# Altium PCB ZIF_to_2xZIF.PcbDoc (part 3 of 3)
Units mil, origin at the board's own origin, x right, y up, seen from the top; angles counter-clockwise.
Board outline 1622.05 x 16535.43 mil, 2 copper layers (Top Layer, Bottom Layer), stack 3.189 mil thick; 3 components, 51 nets, 153 pads, 51 vias.
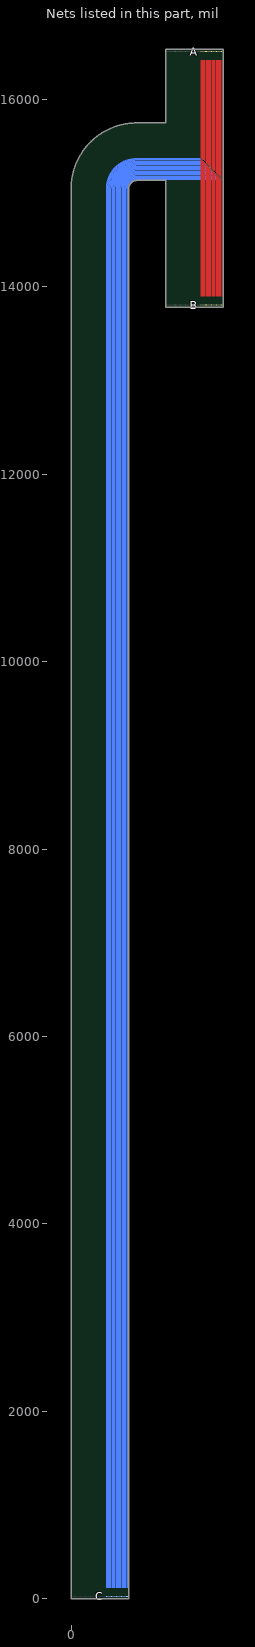
[diagram p3: the nets of this part, all layers, seen from the top]

## Via types
v1: diameter 11.81, hole 3.94, Top Layer to Bottom Layer, 51 vias

## Nets (pads, with @x,y where several pads share a name; then routed paths per layer and width w, separated by ;. In a path a pad name is that pad's centre, name@x,y a point inside that pad or via, vN(x,y) a via of type N, cw(c..) or ccw(c..) an arc to the next point about the centre after c; other vN are vias at no path point) (continued)
FPC_32: A.32 B.32 C.32 | length 18635.1
  Top Layer w3.94: 1385.83,15110.24 1385.83,15759.84
  Top Layer w7.87: 1385.83,13899.61 1385.83,15110.24 ; 1385.83,15759.84 1385.83,16415.35
  Bottom Layer w3.94: 377.95,14881.89 377.95,15047.24 378,15052.88 378.15,15058.51 378.4,15064.14 378.74,15069.76 379.18,15075.38 379.72,15080.99 380.36,15086.59 381.09,15092.17 381.93,15097.75 382.86,15103.3 383.88,15108.84 385.01,15114.37 386.23,15119.87 387.54,15125.34 388.95,15130.8 390.46,15136.23 392.06,15141.63 393.75,15147.01 395.54,15152.35 397.42,15157.66 399.4,15162.94 401.46,15168.18 403.62,15173.39 405.86,15178.55 408.2,15183.68 410.63,15188.77 413.14,15193.81 415.74,15198.81 418.43,15203.76 421.2,15208.66 424.06,15213.52 427.01,15218.32 430.04,15223.07 433.15,15227.77 436.34,15232.41 439.61,15237 442.96,15241.53 446.39,15246 449.9,15250.41 453.48,15254.76 457.14,15259.04 460.87,15263.26 464.68,15267.42 468.56,15271.5 472.51,15275.52 476.53,15279.47 480.61,15283.35 484.77,15287.16 488.99,15290.89 493.27,15294.55 497.62,15298.13 502.03,15301.64 506.5,15305.07 511.03,15308.42 515.62,15311.69 520.26,15314.89 524.96,15318 529.71,15321.02 534.52,15323.97 539.37,15326.83 544.27,15329.6 549.23,15332.29 554.22,15334.89 559.27,15337.41 564.35,15339.83 569.48,15342.17 574.65,15344.42 579.85,15346.57 585.09,15348.64 590.37,15350.61 595.68,15352.49 601.03,15354.28 606.4,15355.97 611.8,15357.57 617.23,15359.08 622.69,15360.49 628.17,15361.8 633.67,15363.02 639.19,15364.15 644.73,15365.17 650.28,15366.1 655.86,15366.94 661.44,15367.67 667.04,15368.31 672.65,15368.85 678.27,15369.29 683.89,15369.64 689.52,15369.88 695.15,15370.03 700.79,15370.08 v1(1385.83,15370.08)
  Bottom Layer w7.87: 377.95,120.08 377.95,14881.89
FPC_33: A.33 B.33 C.33 | length 18628.3
  Top Layer w3.94: 1397.64,15110.24 1397.64,15759.84
  Top Layer w7.87: 1397.64,13899.61 1397.64,15110.24 ; 1397.64,15759.84 1397.64,16415.35
  Bottom Layer w3.94: 389.76,14881.89 389.76,15047.24 389.81,15052.67 389.95,15058.1 390.19,15063.52 390.52,15068.94 390.95,15074.35 391.47,15079.75 392.08,15085.15 392.79,15090.53 393.59,15095.9 394.49,15101.25 395.48,15106.59 396.56,15111.91 397.74,15117.21 399,15122.49 400.36,15127.74 401.81,15132.97 403.35,15138.18 404.99,15143.36 406.71,15148.5 408.52,15153.62 410.42,15158.7 412.41,15163.76 414.49,15168.77 416.65,15173.75 418.9,15178.69 421.24,15183.59 423.66,15188.45 426.17,15193.26 428.76,15198.03 431.43,15202.76 434.19,15207.43 437.02,15212.06 439.94,15216.64 442.94,15221.17 446.01,15225.64 449.16,15230.06 452.39,15234.42 455.7,15238.73 459.08,15242.98 462.53,15247.17 466.05,15251.29 469.65,15255.36 473.32,15259.36 477.06,15263.3 480.86,15267.17 484.73,15270.98 488.67,15274.71 492.67,15278.38 496.74,15281.98 500.87,15285.5 505.05,15288.95 509.3,15292.33 513.61,15295.64 517.97,15298.87 522.39,15302.02 526.87,15305.09 531.39,15308.09 535.97,15311.01 540.6,15313.84 545.28,15316.6 550,15319.27 554.77,15321.86 559.59,15324.37 564.44,15326.79 569.34,15329.13 574.28,15331.38 579.26,15333.54 584.28,15335.62 589.33,15337.61 594.41,15339.51 599.53,15341.32 604.68,15343.05 609.85,15344.68 615.06,15346.22 620.29,15347.67 625.54,15349.03 630.82,15350.3 636.12,15351.47 641.44,15352.55 646.78,15353.54 652.13,15354.44 657.5,15355.24 662.88,15355.95 668.28,15356.56 673.68,15357.08 679.09,15357.51 684.51,15357.84 689.93,15358.08 695.36,15358.22 700.79,15358.27 v1(1397.64,15358.27)
  Bottom Layer w7.87: 389.76,120.08 389.76,14881.89
FPC_34: A.34 B.34 C.34 | length 18621.6
  Top Layer w3.94: 1409.45,15110.24 1409.45,15759.84
  Top Layer w7.87: 1409.45,13899.61 1409.45,15110.24 ; 1409.45,15759.84 1409.45,16415.35
  Bottom Layer w3.94: 401.57,14881.89 401.57,15047.24 401.62,15052.47 401.76,15057.69 401.98,15062.9 402.3,15068.12 402.71,15073.32 403.21,15078.52 403.81,15083.71 404.49,15088.89 405.26,15094.05 406.12,15099.2 407.07,15104.34 408.11,15109.45 409.24,15114.55 410.46,15119.63 411.77,15124.69 413.17,15129.72 414.65,15134.73 416.22,15139.71 417.88,15144.66 419.62,15149.58 421.45,15154.47 423.36,15159.33 425.36,15164.16 427.44,15168.94 429.61,15173.7 431.86,15178.41 434.19,15183.08 436.6,15187.72 439.09,15192.31 441.66,15196.85 444.31,15201.35 447.04,15205.8 449.85,15210.21 452.73,15214.56 455.69,15218.87 458.72,15223.12 461.83,15227.31 465,15231.46 468.26,15235.54 471.58,15239.57 474.97,15243.55 478.43,15247.46 481.96,15251.31 485.55,15255.09 489.21,15258.82 492.94,15262.48 496.72,15266.07 500.58,15269.6 504.49,15273.06 508.46,15276.45 512.49,15279.78 516.57,15283.03 520.72,15286.21 524.91,15289.31 529.17,15292.34 533.47,15295.3 537.82,15298.18 542.23,15300.99 546.68,15303.72 551.18,15306.37 555.73,15308.94 560.32,15311.43 564.95,15313.84 569.62,15316.17 574.33,15318.42 579.09,15320.59 583.88,15322.67 588.7,15324.67 593.56,15326.58 598.45,15328.41 603.37,15330.16 608.33,15331.81 613.31,15333.38 618.31,15334.87 623.35,15336.26 628.4,15337.57 633.48,15338.79 638.58,15339.92 643.69,15340.96 648.83,15341.91 653.98,15342.77 659.15,15343.54 664.32,15344.23 669.51,15344.82 674.71,15345.32 679.92,15345.73 685.13,15346.05 690.35,15346.27 695.57,15346.41 700.79,15346.46 v1(1409.45,15346.46)
  Bottom Layer w7.87: 401.57,120.08 401.57,14881.89
FPC_35: A.35 B.35 C.35 | length 18614.8
  Top Layer w3.94: 1421.26,15110.24 1421.26,15759.84
  Top Layer w7.87: 1421.26,13899.61 1421.26,15110.24 ; 1421.26,15759.84 1421.26,16415.35
  Bottom Layer w3.94: 413.39,14881.89 413.39,15047.24 413.43,15052.26 413.56,15057.27 413.78,15062.29 414.09,15067.29 414.48,15072.29 414.96,15077.29 415.53,15082.27 416.18,15087.24 416.92,15092.2 417.75,15097.15 418.67,15102.08 419.67,15107 420.75,15111.9 421.92,15116.77 423.18,15121.63 424.52,15126.46 425.94,15131.27 427.45,15136.06 429.04,15140.81 430.72,15145.54 432.47,15150.24 434.31,15154.91 436.23,15159.54 438.23,15164.14 440.31,15168.71 442.47,15173.23 444.71,15177.72 447.03,15182.17 449.42,15186.58 451.89,15190.94 454.44,15195.27 457.06,15199.54 459.75,15203.77 462.52,15207.96 465.36,15212.09 468.27,15216.17 471.26,15220.21 474.31,15224.19 477.43,15228.11 480.62,15231.98 483.88,15235.8 487.21,15239.55 490.6,15243.25 494.05,15246.89 497.56,15250.47 501.14,15253.98 504.78,15257.44 508.48,15260.83 512.24,15264.15 516.05,15267.41 519.92,15270.6 523.85,15273.72 527.82,15276.77 531.86,15279.76 535.94,15282.67 540.07,15285.51 544.26,15288.28 548.49,15290.97 552.76,15293.6 557.09,15296.14 561.45,15298.61 565.86,15301 570.31,15303.32 574.8,15305.56 579.33,15307.72 583.89,15309.8 588.49,15311.8 593.12,15313.72 597.79,15315.56 602.49,15317.31 607.22,15318.99 611.98,15320.58 616.76,15322.09 621.57,15323.51 626.4,15324.85 631.26,15326.11 636.14,15327.28 641.03,15328.37 645.95,15329.37 650.88,15330.28 655.83,15331.11 660.79,15331.85 665.76,15332.5 670.75,15333.07 675.74,15333.55 680.74,15333.95 685.75,15334.25 690.76,15334.47 695.77,15334.6 700.79,15334.65 v1(1421.26,15334.65)
  Bottom Layer w7.87: 413.39,120.08 413.39,14881.89
FPC_36: A.36 B.36 C.36 | length 18608.1
  Top Layer w3.94: 1433.07,15110.24 1433.07,15759.84
  Top Layer w7.87: 1433.07,13899.61 1433.07,15110.24 ; 1433.07,15759.84 1433.07,16415.35
  Bottom Layer w3.94: 425.2,14881.89 425.2,15047.24 425.24,15052.05 425.36,15056.86 425.57,15061.67 425.87,15066.47 426.25,15071.26 426.71,15076.05 427.25,15080.83 427.88,15085.6 428.59,15090.36 429.38,15095.1 430.26,15099.83 431.22,15104.54 432.26,15109.24 433.38,15113.92 434.59,15118.57 435.87,15123.21 437.24,15127.82 438.69,15132.41 440.21,15136.97 441.82,15141.5 443.5,15146.01 445.26,15150.48 447.11,15154.93 449.02,15159.34 451.02,15163.71 453.09,15168.06 455.23,15172.36 457.46,15176.63 459.75,15180.85 462.12,15185.04 464.56,15189.18 467.07,15193.28 469.66,15197.34 472.31,15201.35 475.04,15205.32 477.83,15209.23 480.69,15213.1 483.62,15216.91 486.61,15220.68 489.67,15224.39 492.8,15228.05 495.98,15231.65 499.23,15235.2 502.54,15238.69 505.92,15242.12 509.35,15245.49 512.84,15248.8 516.38,15252.05 519.98,15255.23 523.64,15258.36 527.35,15261.42 531.12,15264.41 534.93,15267.34 538.8,15270.2 542.72,15272.99 546.68,15275.72 550.69,15278.37 554.75,15280.96 558.85,15283.47 562.99,15285.91 567.18,15288.28 571.41,15290.58 575.67,15292.8 579.98,15294.94 584.32,15297.01 588.69,15299.01 593.11,15300.93 597.55,15302.77 602.02,15304.53 606.53,15306.21 611.06,15307.82 615.63,15309.35 620.21,15310.79 624.82,15312.16 629.46,15313.44 634.12,15314.65 638.79,15315.77 643.49,15316.81 648.2,15317.77 652.93,15318.65 657.68,15319.44 662.43,15320.15 667.2,15320.78 671.98,15321.32 676.77,15321.79 681.56,15322.16 686.36,15322.46 691.17,15322.67 695.98,15322.79 700.79,15322.83 v1(1433.07,15322.83)
  Bottom Layer w7.87: 425.2,120.08 425.2,14881.89
FPC_37: A.37 B.37 C.37 | length 18601.3
  Top Layer w3.94: 1444.88,15110.24 1444.88,15759.84
  Top Layer w7.87: 1444.88,13899.61 1444.88,15110.24 ; 1444.88,15759.84 1444.88,16415.35
  Bottom Layer w3.94: 437.01,14881.89 437.01,15047.24 437.05,15051.85 437.17,15056.45 437.37,15061.05 437.65,15065.64 438.01,15070.23 438.45,15074.82 438.97,15079.39 439.57,15083.96 440.26,15088.51 441.02,15093.05 441.85,15097.58 442.77,15102.09 443.77,15106.58 444.84,15111.06 446,15115.52 447.23,15119.95 448.53,15124.37 449.92,15128.76 451.38,15133.12 452.92,15137.46 454.53,15141.77 456.22,15146.06 457.98,15150.31 459.81,15154.53 461.72,15158.72 463.7,15162.88 465.76,15167 467.88,15171.08 470.08,15175.13 472.35,15179.13 474.68,15183.1 477.09,15187.03 479.56,15190.91 482.1,15194.75 484.71,15198.54 487.39,15202.29 490.12,15205.99 492.93,15209.64 495.79,15213.25 498.72,15216.8 501.71,15220.3 504.76,15223.75 507.87,15227.14 511.04,15230.48 514.27,15233.76 517.55,15236.99 520.89,15240.16 524.28,15243.27 527.73,15246.32 531.23,15249.31 534.79,15252.24 538.39,15255.11 542.04,15257.91 545.74,15260.65 549.49,15263.32 553.28,15265.93 557.12,15268.47 561.01,15270.94 564.93,15273.35 568.9,15275.68 572.9,15277.95 576.95,15280.15 581.03,15282.27 585.15,15284.33 589.31,15286.31 593.5,15288.22 597.72,15290.05 601.97,15291.82 606.26,15293.5 610.57,15295.12 614.91,15296.65 619.27,15298.11 623.67,15299.5 628.08,15300.81 632.52,15302.04 636.97,15303.19 641.45,15304.26 645.94,15305.26 650.46,15306.18 654.98,15307.02 659.52,15307.78 664.08,15308.46 668.64,15309.06 673.21,15309.58 677.8,15310.02 682.39,15310.38 686.98,15310.66 691.58,15310.86 696.18,15310.98 700.79,15311.02 v1(1444.88,15311.02)
  Bottom Layer w7.87: 437.01,120.08 437.01,14881.89
FPC_38: A.38 B.38 C.38 | length 18594.6
  Top Layer w3.94: 1456.69,15110.24 1456.69,15759.84
  Top Layer w7.87: 1456.69,13899.61 1456.69,15110.24 ; 1456.69,15759.84 1456.69,16415.35
  Bottom Layer w3.94: 448.82,14881.89 448.82,15047.24 448.86,15051.64 448.97,15056.04 449.16,15060.43 449.43,15064.82 449.78,15069.2 450.2,15073.58 450.7,15077.95 451.27,15082.31 451.92,15086.66 452.65,15091 453.45,15095.32 454.32,15099.63 455.28,15103.92 456.3,15108.2 457.4,15112.46 458.58,15116.7 459.83,15120.91 461.15,15125.11 462.55,15129.28 464.01,15133.42 465.55,15137.54 467.17,15141.63 468.85,15145.7 470.6,15149.73 472.43,15153.73 474.32,15157.7 476.28,15161.64 478.31,15165.54 480.41,15169.4 482.58,15173.23 484.81,15177.02 487.11,15180.77 489.47,15184.48 491.9,15188.14 494.39,15191.77 496.94,15195.35 499.56,15198.88 502.23,15202.37 504.97,15205.81 507.77,15209.21 510.62,15212.55 513.54,15215.84 516.51,15219.09 519.54,15222.28 522.62,15225.41 525.76,15228.5 528.95,15231.52 532.19,15234.49 535.48,15237.41 538.83,15240.26 542.22,15243.06 545.66,15245.8 549.15,15248.48 552.68,15251.09 556.26,15253.64 559.89,15256.14 563.56,15258.56 567.26,15260.93 571.01,15263.22 574.8,15265.46 578.63,15267.62 582.5,15269.72 586.4,15271.75 590.33,15273.71 594.3,15275.61 598.3,15277.43 602.34,15279.18 606.4,15280.87 610.49,15282.48 614.61,15284.02 618.75,15285.49 622.92,15286.88 627.12,15288.2 631.34,15289.45 635.57,15290.63 639.83,15291.73 644.11,15292.75 648.4,15293.71 652.71,15294.58 657.03,15295.38 661.37,15296.11 665.72,15296.76 670.08,15297.33 674.45,15297.83 678.83,15298.25 683.21,15298.6 687.6,15298.87 691.99,15299.06 696.39,15299.17 700.79,15299.21 v1(1456.69,15299.21)
  Bottom Layer w7.87: 448.82,120.08 448.82,14881.89
FPC_39: A.39 B.39 C.39 | length 18587.9
  Top Layer w3.94: 1468.5,15110.24 1468.5,15759.84
  Top Layer w7.87: 1468.5,13899.61 1468.5,15110.24 ; 1468.5,15759.84 1468.5,16415.35
  Bottom Layer w3.94: 460.63,14881.89 460.63,15047.24 460.67,15051.44 460.78,15055.63 460.96,15059.81 461.21,15064 461.54,15068.18 461.95,15072.35 462.42,15076.51 462.97,15080.67 463.59,15084.81 464.28,15088.95 465.04,15093.07 465.88,15097.18 466.79,15101.27 467.76,15105.34 468.81,15109.4 469.93,15113.44 471.12,15117.46 472.38,15121.46 473.71,15125.43 475.11,15129.38 476.58,15133.31 478.12,15137.21 479.72,15141.08 481.39,15144.92 483.13,15148.74 484.94,15152.52 486.81,15156.27 488.74,15159.99 490.74,15163.67 492.8,15167.32 494.93,15170.93 497.12,15174.51 499.37,15178.04 501.69,15181.54 504.06,15184.99 506.5,15188.41 508.99,15191.77 511.54,15195.1 514.15,15198.38 516.82,15201.61 519.54,15204.8 522.32,15207.94 525.15,15211.03 528.03,15214.07 530.97,15217.06 533.96,15220 537,15222.88 540.09,15225.72 543.23,15228.49 546.42,15231.22 549.65,15233.88 552.93,15236.49 556.26,15239.04 559.63,15241.54 563.04,15243.97 566.49,15246.34 569.99,15248.66 573.52,15250.91 577.1,15253.1 580.71,15255.23 584.36,15257.29 588.04,15259.29 591.76,15261.23 595.51,15263.1 599.29,15264.9 603.11,15266.64 606.95,15268.31 610.82,15269.91 614.72,15271.45 618.65,15272.92 622.6,15274.32 626.57,15275.65 630.57,15276.91 634.59,15278.1 638.63,15279.22 642.69,15280.27 646.76,15281.25 650.86,15282.15 654.96,15282.99 659.08,15283.75 663.22,15284.44 667.36,15285.06 671.52,15285.61 675.68,15286.09 679.86,15286.49 684.03,15286.82 688.22,15287.07 692.41,15287.26 696.6,15287.36 700.79,15287.4 v1(1468.5,15287.4)
  Bottom Layer w7.87: 460.63,120.08 460.63,14881.89
FPC_40: A.40 B.40 C.40 | length 18581.1
  Top Layer w3.94: 1480.32,15110.24 1480.32,15759.84
  Top Layer w7.87: 1480.32,13899.61 1480.32,15110.24 ; 1480.32,15759.84 1480.32,16415.35
  Bottom Layer w3.94: 472.44,14881.89 472.44,15047.24 472.48,15051.23 472.58,15055.21 472.75,15059.19 473,15063.17 473.31,15067.15 473.69,15071.11 474.14,15075.07 474.66,15079.02 475.25,15082.97 475.91,15086.9 476.64,15090.81 477.43,15094.72 478.29,15098.61 479.22,15102.49 480.22,15106.34 481.29,15110.18 482.42,15114.01 483.62,15117.81 484.88,15121.59 486.21,15125.34 487.61,15129.08 489.07,15132.78 490.59,15136.47 492.18,15140.12 493.84,15143.75 495.55,15147.34 497.33,15150.91 499.17,15154.45 501.07,15157.95 503.03,15161.42 505.06,15164.85 507.14,15168.25 509.28,15171.61 511.48,15174.93 513.74,15178.22 516.05,15181.46 518.42,15184.67 520.85,15187.83 523.33,15190.95 525.86,15194.02 528.45,15197.05 531.09,15200.04 533.79,15202.98 536.53,15205.87 539.32,15208.71 542.16,15211.5 545.06,15214.25 547.99,15216.94 550.98,15219.58 554.01,15222.17 557.08,15224.7 560.2,15227.18 563.37,15229.61 566.57,15231.98 569.81,15234.29 573.1,15236.55 576.42,15238.75 579.78,15240.89 583.18,15242.98 586.61,15245 590.08,15246.96 593.59,15248.86 597.12,15250.7 600.69,15252.48 604.28,15254.2 607.91,15255.85 611.57,15257.44 615.25,15258.96 618.96,15260.42 622.69,15261.82 626.45,15263.15 630.22,15264.41 634.03,15265.61 637.85,15266.74 641.69,15267.81 645.55,15268.81 649.42,15269.74 653.31,15270.6 657.22,15271.4 661.14,15272.12 665.07,15272.78 669.01,15273.37 672.96,15273.89 676.92,15274.34 680.89,15274.72 684.86,15275.03 688.84,15275.28 692.82,15275.45 696.8,15275.56 700.79,15275.59 v1(1480.32,15275.59)
  Bottom Layer w7.87: 472.44,120.08 472.44,14881.89
FPC_41: A.41 B.41 C.41 | length 18574.4
  Top Layer w3.94: 1492.13,15110.24 1492.13,15759.84
  Top Layer w7.87: 1492.13,13899.61 1492.13,15110.24 ; 1492.13,15759.84 1492.13,16415.35
  Bottom Layer w3.94: 484.25,14881.89 484.25,15047.24 484.28,15051.02 484.38,15054.8 484.55,15058.58 484.78,15062.35 485.08,15066.12 485.44,15069.88 485.87,15073.63 486.36,15077.38 486.92,15081.12 487.54,15084.85 488.23,15088.56 488.98,15092.26 489.8,15095.95 490.68,15099.63 491.63,15103.29 492.64,15106.93 493.71,15110.55 494.85,15114.16 496.05,15117.74 497.31,15121.3 498.63,15124.84 500.02,15128.36 501.47,15131.85 502.97,15135.32 504.54,15138.76 506.17,15142.17 507.85,15145.55 509.6,15148.9 511.4,15152.22 513.26,15155.51 515.18,15158.77 517.15,15161.99 519.19,15165.18 521.27,15168.33 523.41,15171.44 525.61,15174.52 527.85,15177.56 530.16,15180.56 532.51,15183.51 534.91,15186.43 537.37,15189.3 539.87,15192.13 542.42,15194.92 545.02,15197.66 547.67,15200.36 550.37,15203.01 553.11,15205.61 555.9,15208.16 558.73,15210.67 561.6,15213.12 564.52,15215.52 567.47,15217.88 570.47,15220.18 573.51,15222.42 576.59,15224.62 579.7,15226.76 582.85,15228.85 586.04,15230.88 589.26,15232.85 592.52,15234.77 595.81,15236.63 599.13,15238.43 602.48,15240.18 605.86,15241.86 609.28,15243.49 612.71,15245.06 616.18,15246.57 619.67,15248.01 623.19,15249.4 626.73,15250.72 630.29,15251.98 633.87,15253.18 637.48,15254.32 641.1,15255.39 644.74,15256.4 648.4,15257.35 652.08,15258.23 655.77,15259.05 659.47,15259.8 663.19,15260.49 666.91,15261.11 670.65,15261.67 674.4,15262.17 678.15,15262.59 681.92,15262.96 685.68,15263.25 689.45,15263.48 693.23,15263.65 697.01,15263.75 700.79,15263.78 v1(1492.13,15263.78)
  Bottom Layer w7.87: 484.25,120.08 484.25,14881.89
FPC_42: A.42 B.42 C.42 | length 18567.6
  Top Layer w3.94: 1503.94,15110.24 1503.94,15759.84
  Top Layer w7.87: 1503.94,13899.61 1503.94,15110.24 ; 1503.94,15759.84 1503.94,16415.35
  Bottom Layer w3.94: 496.06,14881.89 496.06,15047.24 496.09,15050.82 496.19,15054.39 496.34,15057.96 496.56,15061.52 496.84,15065.09 497.18,15068.64 497.59,15072.19 498.06,15075.74 498.58,15079.27 499.17,15082.79 499.82,15086.31 500.54,15089.81 501.31,15093.3 502.14,15096.77 503.04,15100.23 503.99,15103.67 505.01,15107.1 506.08,15110.51 507.22,15113.9 508.41,15117.26 509.66,15120.61 510.97,15123.94 512.34,15127.24 513.76,15130.51 515.24,15133.76 516.78,15136.99 518.38,15140.19 520.03,15143.36 521.73,15146.5 523.49,15149.61 525.3,15152.68 527.17,15155.73 529.09,15158.75 531.06,15161.72 533.09,15164.67 535.16,15167.58 537.29,15170.45 539.46,15173.28 541.69,15176.08 543.96,15178.84 546.28,15181.56 548.65,15184.23 551.06,15186.87 553.52,15189.46 556.03,15192.01 558.57,15194.51 561.17,15196.97 563.8,15199.38 566.48,15201.75 569.19,15204.07 571.95,15206.34 574.75,15208.57 577.58,15210.74 580.45,15212.87 583.36,15214.94 586.31,15216.97 589.29,15218.94 592.3,15220.86 595.35,15222.73 598.43,15224.54 601.53,15226.3 604.68,15228 607.84,15229.65 611.04,15231.25 614.27,15232.79 617.52,15234.27 620.8,15235.69 624.1,15237.06 627.42,15238.37 630.77,15239.62 634.14,15240.81 637.52,15241.95 640.93,15243.02 644.36,15244.04 647.8,15244.99 651.26,15245.89 654.73,15246.72 658.22,15247.49 661.72,15248.21 665.24,15248.86 668.76,15249.45 672.3,15249.98 675.84,15250.44 679.39,15250.85 682.94,15251.19 686.51,15251.47 690.07,15251.69 693.64,15251.84 697.21,15251.94 700.79,15251.97 v1(1503.94,15251.97)
  Bottom Layer w7.87: 496.06,120.08 496.06,14881.89
FPC_43: A.43 B.43 C.43 | length 18560.9
  Top Layer w3.94: 1515.75,15110.24 1515.75,15759.84
  Top Layer w7.87: 1515.75,13899.61 1515.75,15110.24 ; 1515.75,15759.84 1515.75,16415.35
  Bottom Layer w3.94: 507.87,14881.89 507.87,15047.24 507.9,15050.61 507.99,15053.98 508.14,15057.34 508.34,15060.7 508.61,15064.06 508.93,15067.41 509.31,15070.75 509.75,15074.09 510.25,15077.42 510.8,15080.74 511.42,15084.05 512.09,15087.35 512.82,15090.64 513.6,15093.91 514.45,15097.17 515.35,15100.42 516.3,15103.65 517.32,15106.86 518.38,15110.05 519.51,15113.22 520.69,15116.38 521.92,15119.51 523.21,15122.62 524.55,15125.71 525.95,15128.77 527.4,15131.81 528.9,15134.82 530.46,15137.81 532.06,15140.77 533.72,15143.7 535.43,15146.6 537.19,15149.47 539,15152.31 540.86,15155.12 542.76,15157.89 544.72,15160.64 546.72,15163.34 548.77,15166.01 550.87,15168.65 553.01,15171.25 555.19,15173.81 557.42,15176.33 559.7,15178.81 562.02,15181.25 564.38,15183.65 566.78,15186.01 569.22,15188.33 571.7,15190.61 574.22,15192.84 576.79,15195.02 579.38,15197.17 582.02,15199.26 584.69,15201.31 587.4,15203.31 590.14,15205.27 592.91,15207.18 595.72,15209.03 598.56,15210.84 601.43,15212.6 604.33,15214.31 607.26,15215.97 610.22,15217.58 613.21,15219.13 616.22,15220.63 619.26,15222.08 622.32,15223.48 625.41,15224.82 628.52,15226.11 631.65,15227.34 634.81,15228.52 637.98,15229.65 641.17,15230.72 644.38,15231.73 647.61,15232.68 650.86,15233.58 654.12,15234.43 657.39,15235.21 660.68,15235.94 663.98,15236.61 667.29,15237.23 670.61,15237.78 673.94,15238.28 677.28,15238.72 680.62,15239.1 683.97,15239.42 687.33,15239.69 690.69,15239.89 694.05,15240.04 697.42,15240.13 700.79,15240.16 v1(1515.75,15240.16)
  Bottom Layer w7.87: 507.87,120.08 507.87,14881.89
FPC_44: A.44 B.44 C.44 | length 18554.2
  Top Layer w3.94: 1527.56,15110.24 1527.56,15759.84
  Top Layer w7.87: 1527.56,13899.61 1527.56,15110.24 ; 1527.56,15759.84 1527.56,16415.35
  Bottom Layer w3.94: 519.68,14881.89 519.68,15047.24 519.71,15050.4 519.8,15053.56 519.93,15056.72 520.13,15059.88 520.37,15063.03 520.68,15066.17 521.03,15069.31 521.45,15072.45 521.91,15075.57 522.44,15078.69 523.01,15081.8 523.64,15084.9 524.33,15087.98 525.06,15091.06 525.86,15094.12 526.7,15097.16 527.6,15100.19 528.55,15103.21 529.55,15106.21 530.61,15109.18 531.71,15112.15 532.87,15115.09 534.08,15118.01 535.34,15120.91 536.65,15123.78 538.01,15126.63 539.42,15129.46 540.88,15132.27 542.39,15135.04 543.95,15137.8 545.55,15140.52 547.2,15143.21 548.9,15145.88 550.65,15148.52 552.44,15151.12 554.27,15153.69 556.15,15156.23 558.08,15158.74 560.04,15161.22 562.05,15163.65 564.11,15166.06 566.2,15168.43 568.34,15170.76 570.51,15173.05 572.73,15175.3 574.98,15177.52 577.28,15179.69 579.61,15181.83 581.97,15183.92 584.38,15185.98 586.82,15187.99 589.29,15189.95 591.8,15191.88 594.34,15193.76 596.91,15195.59 599.52,15197.38 602.15,15199.13 604.82,15200.83 607.51,15202.48 610.24,15204.08 612.99,15205.64 615.76,15207.15 618.57,15208.61 621.4,15210.02 624.25,15211.38 627.13,15212.69 630.03,15213.95 632.95,15215.16 635.89,15216.32 638.85,15217.42 641.83,15218.48 644.82,15219.48 647.84,15220.43 650.87,15221.33 653.91,15222.18 656.97,15222.97 660.05,15223.7 663.13,15224.39 666.23,15225.02 669.34,15225.6 672.46,15226.12 675.58,15226.58 678.72,15227 681.86,15227.35 685,15227.66 688.15,15227.91 691.31,15228.1 694.47,15228.24 697.63,15228.32 700.79,15228.35 v1(1527.56,15228.35)
  Bottom Layer w7.87: 519.68,120.08 519.68,14881.89
FPC_45: A.45 B.45 C.45 | length 18547.4
  Top Layer w3.94: 1539.37,15110.24 1539.37,15759.84
  Top Layer w7.87: 1539.37,13899.61 1539.37,15110.24 ; 1539.37,15759.84 1539.37,16415.35
  Bottom Layer w3.94: 531.5,14881.89 531.5,15047.24 531.52,15050.2 531.6,15053.15 531.73,15056.1 531.91,15059.05 532.14,15062 532.42,15064.94 532.76,15067.88 533.14,15070.8 533.58,15073.73 534.07,15076.64 534.61,15079.55 535.2,15082.44 535.84,15085.33 536.52,15088.2 537.26,15091.06 538.05,15093.91 538.89,15096.74 539.78,15099.56 540.72,15102.36 541.71,15105.15 542.74,15107.91 543.82,15110.66 544.95,15113.39 546.13,15116.1 547.36,15118.79 548.63,15121.46 549.95,15124.1 551.31,15126.72 552.72,15129.32 554.18,15131.89 555.68,15134.44 557.22,15136.95 558.81,15139.45 560.44,15141.91 562.11,15144.35 563.83,15146.75 565.59,15149.13 567.38,15151.47 569.22,15153.78 571.1,15156.06 573.02,15158.31 574.98,15160.52 576.98,15162.7 579.01,15164.84 581.08,15166.95 583.19,15169.02 585.33,15171.06 587.51,15173.05 589.72,15175.01 591.97,15176.93 594.25,15178.81 596.56,15180.65 598.91,15182.45 601.28,15184.2 603.69,15185.92 606.12,15187.59 608.58,15189.22 611.08,15190.81 613.6,15192.36 616.14,15193.85 618.71,15195.31 621.31,15196.72 623.93,15198.08 626.58,15199.4 629.24,15200.67 631.93,15201.9 634.64,15203.08 637.37,15204.21 640.12,15205.29 642.89,15206.33 645.67,15207.31 648.47,15208.25 651.29,15209.14 654.12,15209.98 656.97,15210.77 659.83,15211.51 662.71,15212.2 665.59,15212.84 668.49,15213.43 671.39,15213.96 674.3,15214.45 677.23,15214.89 680.16,15215.27 683.09,15215.61 686.03,15215.89 688.98,15216.12 691.93,15216.3 694.88,15216.43 697.83,15216.51 700.79,15216.54 v1(1539.37,15216.54)
  Bottom Layer w7.87: 531.5,120.08 531.5,14881.89
FPC_46: A.46 B.46 C.46 | length 18540.7
  Top Layer w3.94: 1551.18,15110.24 1551.18,15759.84
  Top Layer w7.87: 1551.18,13899.61 1551.18,15110.24 ; 1551.18,15759.84 1551.18,16415.35
  Bottom Layer w3.94: 543.31,14881.89 543.31,15047.24 543.33,15049.99 543.4,15052.74 543.52,15055.49 543.69,15058.23 543.91,15060.97 544.17,15063.71 544.48,15066.44 544.84,15069.16 545.25,15071.88 545.7,15074.59 546.2,15077.29 546.75,15079.99 547.34,15082.67 547.98,15085.34 548.67,15088 549.41,15090.65 550.19,15093.29 551.01,15095.91 551.89,15098.51 552.8,15101.11 553.77,15103.68 554.77,15106.24 555.83,15108.78 556.92,15111.3 558.06,15113.8 559.25,15116.28 560.47,15118.74 561.74,15121.18 563.05,15123.59 564.41,15125.98 565.8,15128.35 567.24,15130.7 568.71,15133.01 570.23,15135.31 571.79,15137.57 573.38,15139.81 575.02,15142.02 576.69,15144.2 578.4,15146.35 580.15,15148.47 581.94,15150.56 583.76,15152.62 585.61,15154.65 587.51,15156.64 589.43,15158.6 591.39,15160.53 593.39,15162.42 595.41,15164.27 597.47,15166.1 599.56,15167.88 601.68,15169.63 603.83,15171.34 606.01,15173.01 608.22,15174.65 610.46,15176.24 612.73,15177.8 615.02,15179.32 617.34,15180.8 619.68,15182.23 622.05,15183.63 624.44,15184.98 626.85,15186.29 629.29,15187.56 631.75,15188.79 634.23,15189.97 636.73,15191.11 639.25,15192.21 641.79,15193.26 644.35,15194.26 646.93,15195.23 649.52,15196.14 652.12,15197.02 654.74,15197.84 657.38,15198.62 660.03,15199.36 662.69,15200.05 665.36,15200.69 668.05,15201.28 670.74,15201.83 673.44,15202.33 676.15,15202.79 678.87,15203.19 681.6,15203.55 684.33,15203.86 687.06,15204.13 689.8,15204.34 692.55,15204.51 695.29,15204.63 698.04,15204.7 700.79,15204.72 v1(1551.18,15204.72)
  Bottom Layer w7.87: 543.31,120.08 543.31,14881.89
FPC_47: A.47 B.47 C.47 | length 18533.9
  Top Layer w3.94: 1562.99,15110.24 1562.99,15759.84
  Top Layer w7.87: 1562.99,13899.61 1562.99,15110.24 ; 1562.99,15759.84 1562.99,16415.35
  Bottom Layer w3.94: 555.12,14881.89 555.12,15047.24 555.14,15049.79 555.21,15052.33 555.32,15054.87 555.47,15057.41 555.67,15059.94 555.92,15062.47 556.2,15065 556.54,15067.52 556.91,15070.03 557.33,15072.54 557.79,15075.04 558.3,15077.53 558.85,15080.01 559.45,15082.48 560.08,15084.95 560.76,15087.4 561.48,15089.83 562.25,15092.26 563.05,15094.67 563.9,15097.07 564.79,15099.45 565.73,15101.81 566.7,15104.16 567.71,15106.49 568.77,15108.81 569.86,15111.1 571,15113.38 572.17,15115.63 573.38,15117.87 574.63,15120.08 575.92,15122.27 577.25,15124.44 578.62,15126.58 580.02,15128.7 581.46,15130.8 582.94,15132.87 584.45,15134.91 586,15136.93 587.58,15138.92 589.2,15140.88 590.85,15142.81 592.53,15144.72 594.25,15146.59 596,15148.43 597.78,15150.25 599.6,15152.03 601.44,15153.78 603.32,15155.5 605.22,15157.18 607.15,15158.83 609.11,15160.45 611.1,15162.03 613.12,15163.58 615.17,15165.09 617.23,15166.57 619.33,15168.01 621.45,15169.41 623.59,15170.78 625.76,15172.11 627.95,15173.4 630.17,15174.65 632.4,15175.86 634.65,15177.04 636.93,15178.17 639.22,15179.27 641.54,15180.32 643.87,15181.33 646.22,15182.31 648.58,15183.24 650.97,15184.13 653.36,15184.98 655.77,15185.78 658.2,15186.55 660.64,15187.27 663.09,15187.95 665.55,15188.59 668.02,15189.18 670.5,15189.73 672.99,15190.24 675.49,15190.7 678,15191.12 680.51,15191.5 683.03,15191.83 685.56,15192.12 688.09,15192.36 690.63,15192.56 693.16,15192.71 695.7,15192.82 698.25,15192.89 700.79,15192.91 v1(1562.99,15192.91)
  Bottom Layer w7.87: 555.12,120.08 555.12,14881.89
FPC_48: A.48 B.48 C.48 | length 18527.2
  Top Layer w3.94: 1574.8,15110.24 1574.8,15759.84
  Top Layer w7.87: 1574.8,13899.61 1574.8,15110.24 ; 1574.8,15759.84 1574.8,16415.35
  Bottom Layer w3.94: 566.93,14881.89 566.93,15047.24 566.95,15049.58 567.01,15051.92 567.11,15054.25 567.26,15056.58 567.44,15058.91 567.66,15061.24 567.93,15063.56 568.23,15065.87 568.58,15068.18 568.96,15070.49 569.39,15072.79 569.85,15075.07 570.36,15077.36 570.91,15079.63 571.49,15081.89 572.11,15084.14 572.78,15086.38 573.48,15088.61 574.22,15090.82 575,15093.03 575.82,15095.21 576.68,15097.39 577.57,15099.55 578.5,15101.69 579.47,15103.82 580.48,15105.92 581.52,15108.01 582.6,15110.09 583.71,15112.14 584.86,15114.17 586.05,15116.19 587.27,15118.18 588.52,15120.15 589.81,15122.1 591.14,15124.02 592.49,15125.92 593.88,15127.8 595.31,15129.66 596.76,15131.48 598.25,15133.29 599.76,15135.06 601.31,15136.81 602.89,15138.54 604.5,15140.23 606.14,15141.9 607.8,15143.53 609.5,15145.14 611.22,15146.72 612.97,15148.27 614.75,15149.79 616.55,15151.27 618.38,15152.73 620.23,15154.15 622.11,15155.54 624.01,15156.89 625.93,15158.22 627.88,15159.51 629.85,15160.76 631.85,15161.98 633.86,15163.17 635.89,15164.32 637.94,15165.43 640.02,15166.51 642.11,15167.56 644.22,15168.56 646.34,15169.53 648.48,15170.46 650.64,15171.36 652.82,15172.21 655.01,15173.03 657.21,15173.81 659.42,15174.55 661.65,15175.25 663.89,15175.92 666.14,15176.54 668.4,15177.13 670.68,15177.67 672.96,15178.18 675.25,15178.64 677.54,15179.07 679.85,15179.45 682.16,15179.8 684.47,15180.1 686.8,15180.37 689.12,15180.59 691.45,15180.78 693.78,15180.92 696.12,15181.02 698.45,15181.08 700.79,15181.1 v1(1574.8,15181.1)
  Bottom Layer w7.87: 566.93,120.08 566.93,14881.89
FPC_49: A.49 B.49 C.49 | length 18520.4
  Top Layer w3.94: 1586.61,15110.24 1586.61,15759.84
  Top Layer w7.87: 1586.61,13899.61 1586.61,15110.24 ; 1586.61,15759.84 1586.61,16415.35
  Bottom Layer w3.94: 578.74,14881.89 578.74,15047.24 578.76,15049.37 578.81,15051.5 578.91,15053.63 579.04,15055.76 579.2,15057.88 579.41,15060 579.65,15062.12 579.93,15064.23 580.24,15066.34 580.59,15068.44 580.98,15070.53 581.41,15072.62 581.87,15074.7 582.37,15076.77 582.9,15078.83 583.47,15080.88 584.07,15082.93 584.71,15084.96 585.39,15086.98 586.1,15088.99 586.85,15090.98 587.63,15092.96 588.44,15094.93 589.29,15096.89 590.17,15098.82 591.09,15100.75 592.04,15102.65 593.03,15104.54 594.04,15106.41 595.09,15108.27 596.17,15110.1 597.29,15111.92 598.43,15113.72 599.61,15115.49 600.81,15117.25 602.05,15118.98 603.32,15120.69 604.61,15122.38 605.94,15124.05 607.29,15125.69 608.68,15127.31 610.09,15128.91 611.53,15130.48 612.99,15132.03 614.49,15133.54 616.01,15135.04 617.55,15136.5 619.12,15137.94 620.72,15139.35 622.34,15140.74 623.98,15142.09 625.65,15143.42 627.34,15144.72 629.05,15145.98 630.78,15147.22 632.54,15148.43 634.32,15149.6 636.11,15150.75 637.93,15151.86 639.76,15152.94 641.62,15153.99 643.49,15155.01 645.38,15155.99 647.29,15156.94 649.21,15157.86 651.15,15158.74 653.1,15159.59 655.07,15160.4 657.05,15161.18 659.04,15161.93 661.05,15162.64 663.07,15163.32 665.1,15163.96 667.15,15164.56 669.2,15165.13 671.26,15165.67 673.33,15166.16 675.41,15166.62 677.5,15167.05 679.59,15167.44 681.7,15167.79 683.8,15168.1 685.91,15168.38 688.03,15168.62 690.15,15168.83 692.27,15168.99 694.4,15169.12 696.53,15169.22 698.66,15169.27 700.79,15169.29 v1(1586.61,15169.29)
  Bottom Layer w7.87: 578.74,120.08 578.74,14881.89
FPC_50: A.50 B.50 C.50 | length 18513.7
  Top Layer w3.94: 1598.43,15110.24 1598.43,15759.84
  Top Layer w7.87: 1598.43,13899.61 1598.43,15110.24 ; 1598.43,15759.84 1598.43,16415.35
  Bottom Layer w3.94: 590.55,14881.89 590.55,15047.24 590.57,15049.17 590.62,15051.09 590.7,15053.01 590.82,15054.93 590.97,15056.85 591.16,15058.77 591.37,15060.68 591.62,15062.59 591.91,15064.49 592.23,15066.39 592.58,15068.28 592.96,15070.16 593.38,15072.04 593.83,15073.91 594.31,15075.78 594.82,15077.63 595.37,15079.47 595.95,15081.31 596.56,15083.13 597.2,15084.95 597.87,15086.75 598.58,15088.54 599.31,15090.32 600.08,15092.08 600.88,15093.83 601.71,15095.57 602.57,15097.29 603.45,15099 604.37,15100.69 605.32,15102.36 606.3,15104.02 607.3,15105.66 608.34,15107.28 609.4,15108.89 610.49,15110.47 611.6,15112.04 612.75,15113.59 613.92,15115.11 615.12,15116.62 616.34,15118.1 617.59,15119.57 618.87,15121.01 620.17,15122.42 621.49,15123.82 622.84,15125.19 624.21,15126.54 625.61,15127.87 627.02,15129.17 628.47,15130.44 629.93,15131.69 631.41,15132.91 632.92,15134.11 634.45,15135.28 635.99,15136.43 637.56,15137.54 639.14,15138.63 640.75,15139.7 642.37,15140.73 644.01,15141.74 645.67,15142.71 647.34,15143.66 649.03,15144.58 650.74,15145.47 652.46,15146.32 654.2,15147.15 655.95,15147.95 657.71,15148.72 659.49,15149.45 661.28,15150.16 663.08,15150.83 664.9,15151.47 666.72,15152.08 668.56,15152.66 670.4,15153.21 672.26,15153.72 674.12,15154.21 675.99,15154.66 677.87,15155.07 679.75,15155.45 681.65,15155.81 683.54,15156.12 685.45,15156.41 687.35,15156.66 689.26,15156.88 691.18,15157.06 693.1,15157.21 695.02,15157.33 696.94,15157.41 698.86,15157.46 700.79,15157.48 v1(1598.43,15157.48)
  Bottom Layer w7.87: 590.55,120.08 590.55,14881.89
FPC_51: A.51 B.51 C.51 | length 18507
  Top Layer w3.94: 1610.24,15110.24 1610.24,15759.84
  Top Layer w7.87: 1610.24,13899.61 1610.24,15110.24 ; 1610.24,15759.84 1610.24,16415.35
  Bottom Layer w3.94: 602.36,14881.89 602.36,15047.24 602.38,15048.96 602.42,15050.68 602.5,15052.4 602.6,15054.11 602.74,15055.82 602.9,15057.53 603.1,15059.24 603.32,15060.94 603.57,15062.64 603.86,15064.34 604.17,15066.02 604.51,15067.71 604.88,15069.38 605.29,15071.06 605.72,15072.72 606.17,15074.37 606.66,15076.02 607.18,15077.66 607.72,15079.29 608.3,15080.91 608.9,15082.52 609.53,15084.11 610.19,15085.7 610.87,15087.28 611.58,15088.84 612.32,15090.39 613.09,15091.93 613.88,15093.45 614.7,15094.96 615.55,15096.46 616.42,15097.94 617.32,15099.4 618.24,15100.85 619.19,15102.28 620.16,15103.7 621.16,15105.1 622.18,15106.48 623.23,15107.84 624.3,15109.19 625.39,15110.51 626.5,15111.82 627.64,15113.1 628.8,15114.37 629.99,15115.62 631.19,15116.84 632.42,15118.05 633.66,15119.23 634.93,15120.39 636.21,15121.53 637.52,15122.64 638.85,15123.73 640.19,15124.8 641.55,15125.85 642.93,15126.87 644.33,15127.87 645.75,15128.84 647.18,15129.79 648.63,15130.71 650.09,15131.61 651.57,15132.48 653.07,15133.33 654.58,15134.15 656.1,15134.94 657.64,15135.71 659.19,15136.45 660.75,15137.16 662.33,15137.84 663.92,15138.5 665.51,15139.13 667.12,15139.73 668.74,15140.31 670.37,15140.85 672.01,15141.37 673.66,15141.86 675.31,15142.32 676.98,15142.75 678.65,15143.15 680.32,15143.52 682.01,15143.86 683.7,15144.17 685.39,15144.46 687.09,15144.71 688.79,15144.94 690.5,15145.13 692.21,15145.29 693.92,15145.43 695.64,15145.53 697.35,15145.61 699.07,15145.65 700.79,15145.67 v1(1610.24,15145.67)
  Bottom Layer w7.87: 602.36,120.08 602.36,14881.89

## Silkscreen, mask and mechanical layers (free items; w line width, h text height)
Top Solder:
  region: 1007.48,13779.53 1622.44,13779.53 1622.44,13897.64 1007.48,13897.64
  region: 1007.48,16417.32 1622.44,16417.32 1622.44,16535.43 1007.48,16535.43
Bottom Solder:
  region: -0.39,0 614.57,0 614.57,118.11 -0.39,118.11
Mechanical 2:
  lines w1.18: 0,0 0,157.48 614.17,157.48 614.17,0 0,0 ; 1007.87,13779.53 1007.87,13937.01 1622.05,13937.01 1622.05,13779.53 1007.87,13779.53 ; 1007.87,16377.95 1007.87,16535.43 1622.05,16535.43 1622.05,16377.95 1007.87,16377.95